# Allegro board TAPFX-CU.brd
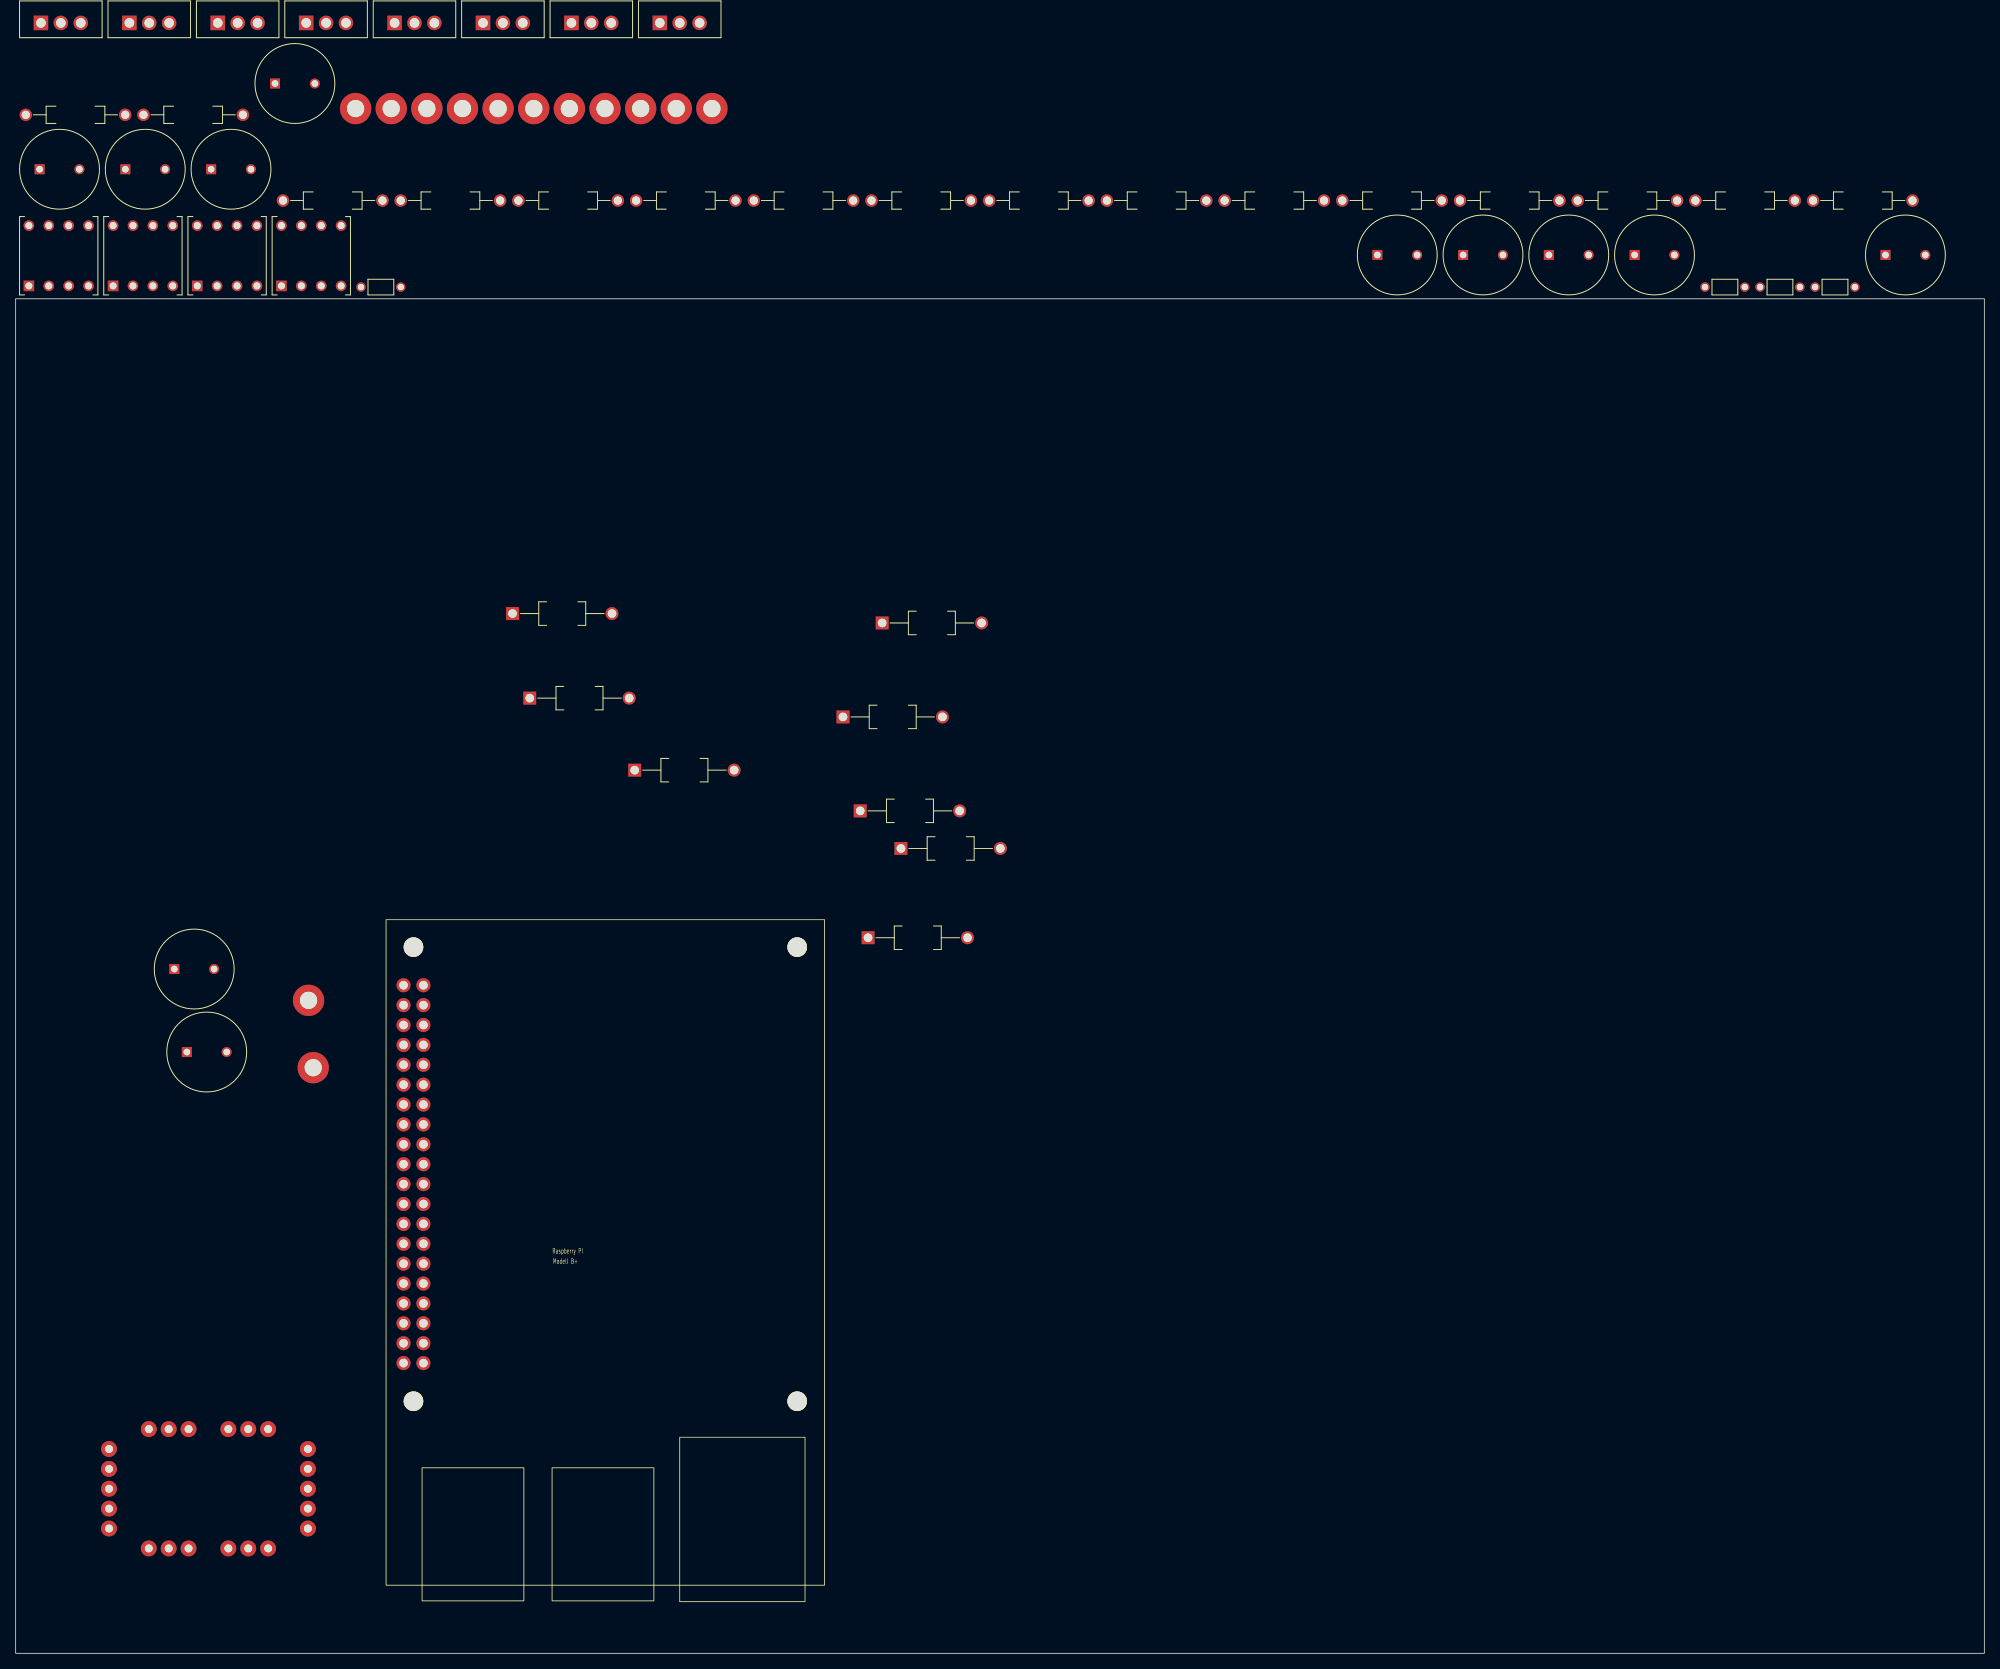
[diagram p0: board, top side]
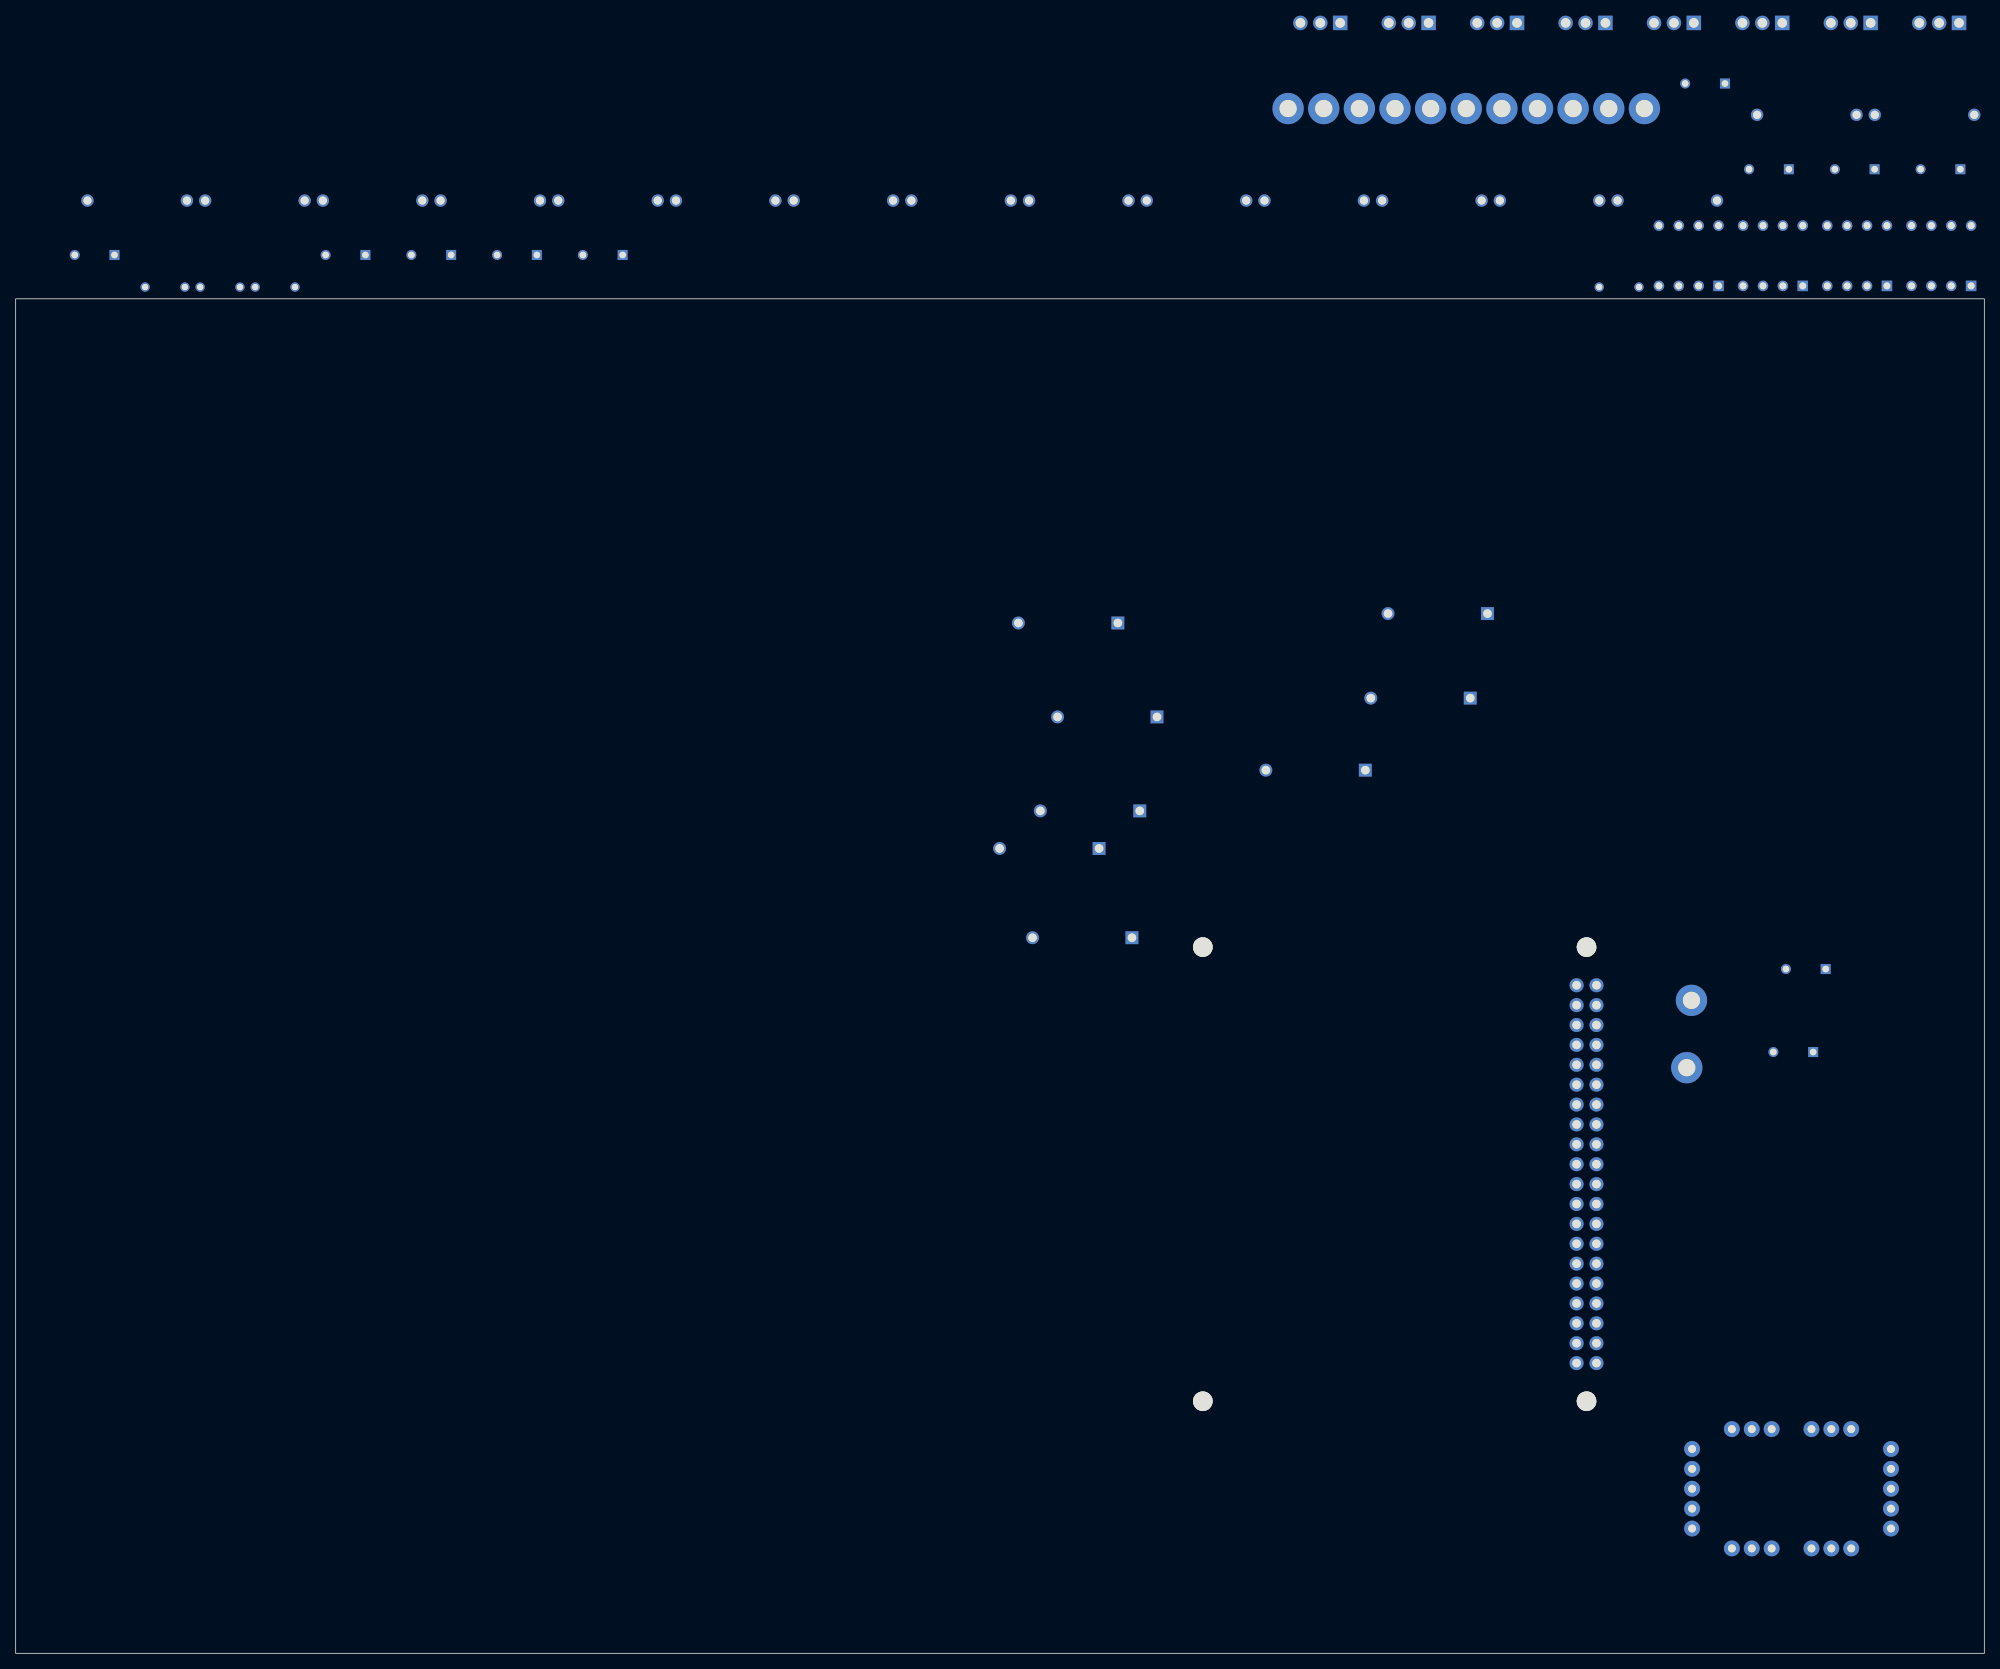
[diagram p1: board, bottom side, seen from below]

Outline 251.4 x 173 mm; copper layers: TOP, IL1-SIGNAL, IL2-PWR, BOTTOM. Coordinates in mm from the lower left corner of the outline.
Outline path: rectangle 0,0 251.4,173

## Design rules (mm)
constraint set DEFAULT: min track width 0.15

## Placement (name value [footprint] x y rotation side)
C1  100uF  [WIRED_CAP100UF]  22.8 87.4 0 top
C2  100uF  [WIRED_CAP100UF]  24.4 76.8 0 top
C3  100uF  [WIRED_CAP100UF]  176.43 178.6 0 top
C4  100nF  [WIRED_C322CAP]  218.27 174.5 0 top
C5  100uF  [WIRED_CAP100UF]  27.5 189.55 0 top
C6  100uF  [WIRED_CAP100UF]  16.55 189.55 0 top
C7  100nF  [WIRED_C322CAP]  46.64 174.5 0 top
C8  100uF  [WIRED_CAP100UF]  5.6 189.55 0 top
C9  100uF  [WIRED_CAP100UF]  241.32 178.6 0 top
C10  100nF  [WIRED_C322CAP]  232.33 174.5 0 top
C11  100uF  [WIRED_CAP100UF]  35.66 200.5 0 top
C12  100uF  [WIRED_CAP100UF]  209.28 178.6 0 top
C13  100nF  [WIRED_C322CAP]  225.3 174.5 0 top
C14  100uF  [WIRED_CAP100UF]  198.33 178.6 0 top
C15  100uF  [WIRED_CAP100UF]  187.38 178.6 0 top
D1  1N4937  [WIRED_1N4937]  69.8 132.8 0 top
D2  1N4937  [WIRED_1N4937]  72 122 0 top
D3  1N4937  [WIRED_1N4937]  85.4 112.8 0 top
D4  1N4937  [WIRED_1N4937]  117 131.6 0 top
D5  1N4937  [WIRED_1N4937]  112 119.6 0 top
D6  1N4937  [WIRED_1N4937]  114.2 107.6 0 top
D7  1N4937  [WIRED_1N4937]  119.4 102.8 0 top
D8  1N4937  [WIRED_1N4937]  115.2 91.4 0 top
J1  H2071-1  [TP2_2]  37.4 83.4 0 top
J2  H2071-1  [TP2_2]  38 74.8 0 top
J3  H2071-1  [TP2_2]  61.61 197.3 0 top
J4  HDR_RASPPI_B+  [RASPI-BPLUS]  50.8 90.2 0 top
J5  H2071-1  [TP2_2]  57.06 197.3 0 top
J6  H2071-1  [TP2_2]  52.51 197.3 0 top
J7  H2071-1  [TP2_2]  47.96 197.3 0 top
J8  H2071-1  [TP2_2]  88.91 197.3 0 top
J9  H2071-1  [TP2_2]  43.41 197.3 0 top
J10  H2071-1  [TP2_2]  84.36 197.3 0 top
J11  H2071-1  [TP2_2]  79.81 197.3 0 top
J12  H2071-1  [TP2_2]  75.26 197.3 0 top
J13  H2071-1  [TP2_2]  70.71 197.3 0 top
J14  H2071-1  [TP2_2]  66.16 197.3 0 top
R1  100  [WIRED_KOHLESCHICHT]  40.49 185.55 0 top
R2  10R  [WIRED_KOHLESCHICHT]  220.85 185.55 0 top
R3  100  [WIRED_KOHLESCHICHT]  100.61 185.55 0 top
R4  10R  [WIRED_KOHLESCHICHT]  235.88 185.55 0 top
R5  100  [WIRED_KOHLESCHICHT]  115.64 185.55 0 top
R6  10R  [WIRED_KOHLESCHICHT]  7.64 196.5 0 top
R7  100  [WIRED_KOHLESCHICHT]  130.67 185.55 0 top
R8  10R  [WIRED_KOHLESCHICHT]  22.67 196.5 0 top
R9  100  [WIRED_KOHLESCHICHT]  145.7 185.55 0 top
R10  10R  [WIRED_KOHLESCHICHT]  160.73 185.55 0 top
R11  100  [WIRED_KOHLESCHICHT]  55.52 185.55 0 top
R12  10R  [WIRED_KOHLESCHICHT]  175.76 185.55 0 top
R13  100  [WIRED_KOHLESCHICHT]  70.55 185.55 0 top
R14  10R  [WIRED_KOHLESCHICHT]  190.79 185.55 0 top
R15  100  [WIRED_KOHLESCHICHT]  85.58 185.55 0 top
R16  10R  [WIRED_KOHLESCHICHT]  205.82 185.55 0 top
T1  IRF540N  [IRF540N_TO220AB]  3.23 208.24 0 top
T2  IRF540N  [IRF540N_TO220AB]  14.52 208.24 0 top
T3  IRF540N  [IRF540N_TO220AB]  25.81 208.24 0 top
T4  IRF540N  [IRF540N_TO220AB]  37.1 208.24 0 top
T5  IRF540N  [IRF540N_TO220AB]  48.39 208.24 0 top
T6  IRF540N  [IRF540N_TO220AB]  59.68 208.24 0 top
T7  IRF540N  [IRF540N_TO220AB]  70.97 208.24 0 top
T8  IRF540N  [IRF540N_TO220AB]  82.26 208.24 0 top
U1  -  [AF-TLC59711]  17 13.4 0 top
U2  MCP14E7  [DIP8_SOCKET]  16.25 178.5 0 top
U3  MCP14E7  [DIP8_SOCKET]  27 178.5 0 top
U4  MCP14E7  [DIP8_SOCKET]  37.75 178.5 0 top
U5  MCP14E7  [DIP8_SOCKET]  5.5 178.5 0 top

## Library data of the parts
C1-C3 C5 C6 C8 C9 C11 C12 C14 C15 = C_elect
C4 C7 C10 C13 = C
D1-D8 = DIODE
J1-J3 J5-J14 = Junction-th
J4 = HDR_RASPPI_BPlus_0
R1-R16 = R
T1-T8 = NMOS
U1 = AF-TLC59711_0
U2-U5 = MCP14E7

## Footprints (pads in the part's own frame, mm; a bottom-side part is the same pattern mirrored in y, then rotated)
AF-TLC59711
  round 2.032 hole 1.016: 1(0,0) 2(2.54,0) 3(5.08,0) 4(10.16,0) 5(12.7,0) 6(15.24,0) 7(15.24,15.24) 8(12.7,15.24) 9(10.16,15.24) 10(5.08,15.24) 11(2.54,15.24) 12(0,15.24) 13(-5.08,12.7) 14(-5.08,10.16) 15(-5.08,7.62) 16(-5.08,5.08) 17(-5.08,2.54) 18(20.32,12.7) 19(20.32,10.16) 20(20.32,7.62) 21(20.32,5.08) 22(20.32,2.54)
DIP8_SOCKET
  rect 1.35x1.35 hole 0.9: 1(-3.81,-3.85)
  round 1.35 hole 0.9: 2(-1.27,-3.85) 3(1.27,-3.85) 4(3.81,-3.85) 5(3.81,3.85) 6(1.27,3.85) 7(-1.27,3.85) 8(-3.81,3.85)
IRF540N_TO220AB
  round 1.85 hole 1.23: D(2.54,0) S(5.08,0)
  rect 1.85x1.85 hole 1.23: G(0,0)
RASPI-BPLUS
  round 2.5 hole 2.5 unplated: (0,0) (0,-58) (49,0) (49,-58)
  round 1.8 hole 1.1: 1(1.27,-4.87) 2(-1.27,-4.87) 3(1.27,-7.41) 4(-1.27,-7.41) 5(1.27,-9.95) 6(-1.27,-9.95) 7(1.27,-12.49) 8(-1.27,-12.49) 9(1.27,-15.03) 10(-1.27,-15.03) 11(1.27,-17.57) 12(-1.27,-17.57) 13(1.27,-20.11) 14(-1.27,-20.11) 15(1.27,-22.65) 16(-1.27,-22.65) 17(1.27,-25.19) 18(-1.27,-25.19) 19(1.27,-27.73) 20(-1.27,-27.73) 21(1.27,-30.27) 22(-1.27,-30.27) 23(1.27,-32.81) 24(-1.27,-32.81) 25(1.27,-35.35) 26(-1.27,-35.35) 27(1.27,-37.89) 28(-1.27,-37.89) 29(1.27,-40.43) 30(-1.27,-40.43) 31(1.27,-42.97) 32(-1.27,-42.97) 33(1.27,-45.51) 34(-1.27,-45.51) 35(1.27,-48.05) 36(-1.27,-48.05) 37(1.27,-50.59) 38(-1.27,-50.59) 39(1.27,-53.13) 40(-1.27,-53.13)
TP2_2
  round 4 hole 2.2: 1(0,0)
WIRED_1N4937
  round 1.65 hole 1.1: A(6.35,0)
  rect 1.65x1.65 hole 1.1: K(-6.35,0)
WIRED_C322CAP
  round 1.2 hole 0.8: 1(-2.54,0) 2(2.54,0)
WIRED_CAP100UF
  round 1.28 hole 0.85: N(2.54,0)
  rect 1.28x1.28 hole 0.85: P(-2.54,0)
WIRED_KOHLESCHICHT
  round 1.58 hole 1.05: 1(-6.35,0) 2(6.35,0)

## Nets
+3.3V: J3.1 J4.1 J4.17
+5V: C1.P C2.P C3.P J1.1 J4.2 J4.4 U1.14 U1.19(VCC1)
+12V: C4.1 C5.P C6.P C7.1 C8.P C9.P C10.1 C11.P C12.P C13.1 C14.P C15.P J2.1 J7.1 J9.1 J11.1 J13.1 U2.6 U3.6 U4.6 U5.6
GND_SIGNAL: C1.N(-) C2.N(-) C3.N(-) C4.2 C5.N(-) C6.N(-) C7.2 C8.N(-) C9.N(-) C10.2 C11.N(-) C12.N(-) C13.2 C14.N(-) C15.N(-) D1.A D2.A D3.A D4.A D5.A D6.A D7.A D8.A J4.6 J4.9 J4.14 J4.20 J4.25 J4.30 J4.34 J4.39 J5.1 T1.S T2.S T3.S T4.S T5.S T6.S T7.S T8.S U1.13 U1.18 U2.3 U3.3 U4.3 U5.3
N04456_TREIBER1: R2.2 U2.7
N04456_TREIBER2: R6.2 U3.7
N04456_TREIBER3: R10.2 U4.7
N04456_TREIBER4: R14.2 U5.7
N04477_TREIBER1: R2.1 T1.G
N04477_TREIBER2: R6.1 T3.G
N04477_TREIBER3: R10.1 T5.G
N04477_TREIBER4: R14.1 T7.G
N04481_TREIBER1: R4.1 T2.G
N04481_TREIBER2: R8.1 T4.G
N04481_TREIBER3: R12.1 T6.G
N04481_TREIBER4: R16.1 T8.G
N04485_TREIBER1: R4.2 U2.5(OUT)
N04485_TREIBER2: R8.2 U3.5(OUT)
N04485_TREIBER3: R12.2 U4.5(OUT)
N04485_TREIBER4: R16.2 U5.5(OUT)
N05010_TREIBER1: D1.K D2.K J8.1 T1.D T2.D
N05010_TREIBER2: D3.K D4.K J10.1 T3.D T4.D
N05010_TREIBER3: D5.K D6.K J12.1 T5.D T6.D
N05010_TREIBER4: D7.K D8.K J14.1 T7.D T8.D
N06462_TREIBER1: R1.1 U2.2
N06462_TREIBER2: R5.1 U3.2
N06462_TREIBER3: R9.1 U4.2
N06462_TREIBER4: R13.1 U5.2
N06496_TREIBER1: R3.1 U2.4
N06496_TREIBER2: R7.1 U3.4
N06496_TREIBER3: R11.1 U4.4
N06496_TREIBER4: R15.1 U5.4
N04440: J4.21 U1.21
N04659: J4.19 U1.16
N04671: J4.23 U1.17
N05235: R1.2 R3.2 U1.1
N05269: R5.2 R7.2 U1.4
N05308: R9.2 R11.2 U1.7
N05322: R13.2 R15.2 U1.10
N07201: J4.12 J6.1

Pads without a net: J4 3 5 7 8 10 11 13 15 16 18 22 24 26 27 28 29 31 32 33 35 36 37 38 40; U1 2 3 5 6 8 9 11 12 15 20 22; U2 1 8; U3 1 8; U4 1 8; U5 1 8
